# Altium PCB Mach dieu khien dong co dc luu tru.PcbDoc
Units mm, origin at the board's own origin, x right, y up, seen from the top; angles counter-clockwise.
Board outline 133.35 x 92.46 mm, 2 copper layers (Top Layer, Bottom Layer); 58 components, 49 nets, 191 pads, 14 vias.
Unrouted connection lines stored in the file: 6.
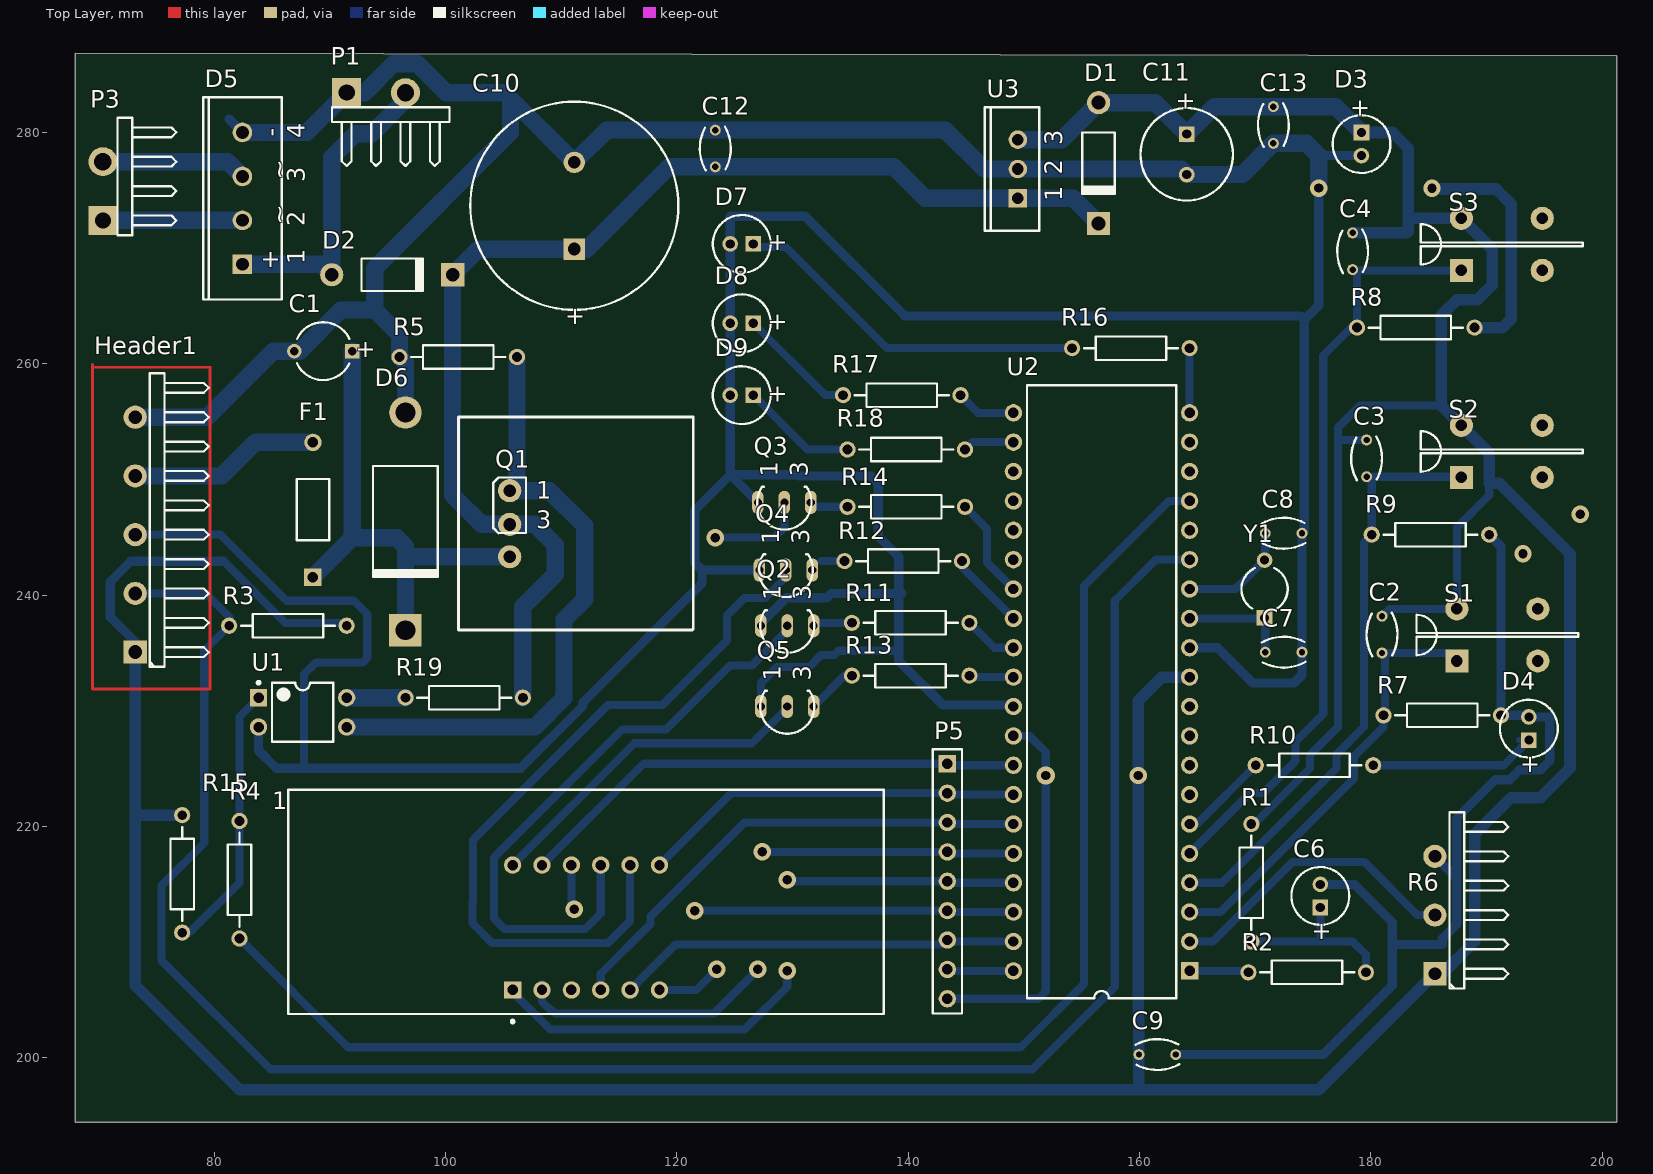
[diagram p0: Top Layer view]
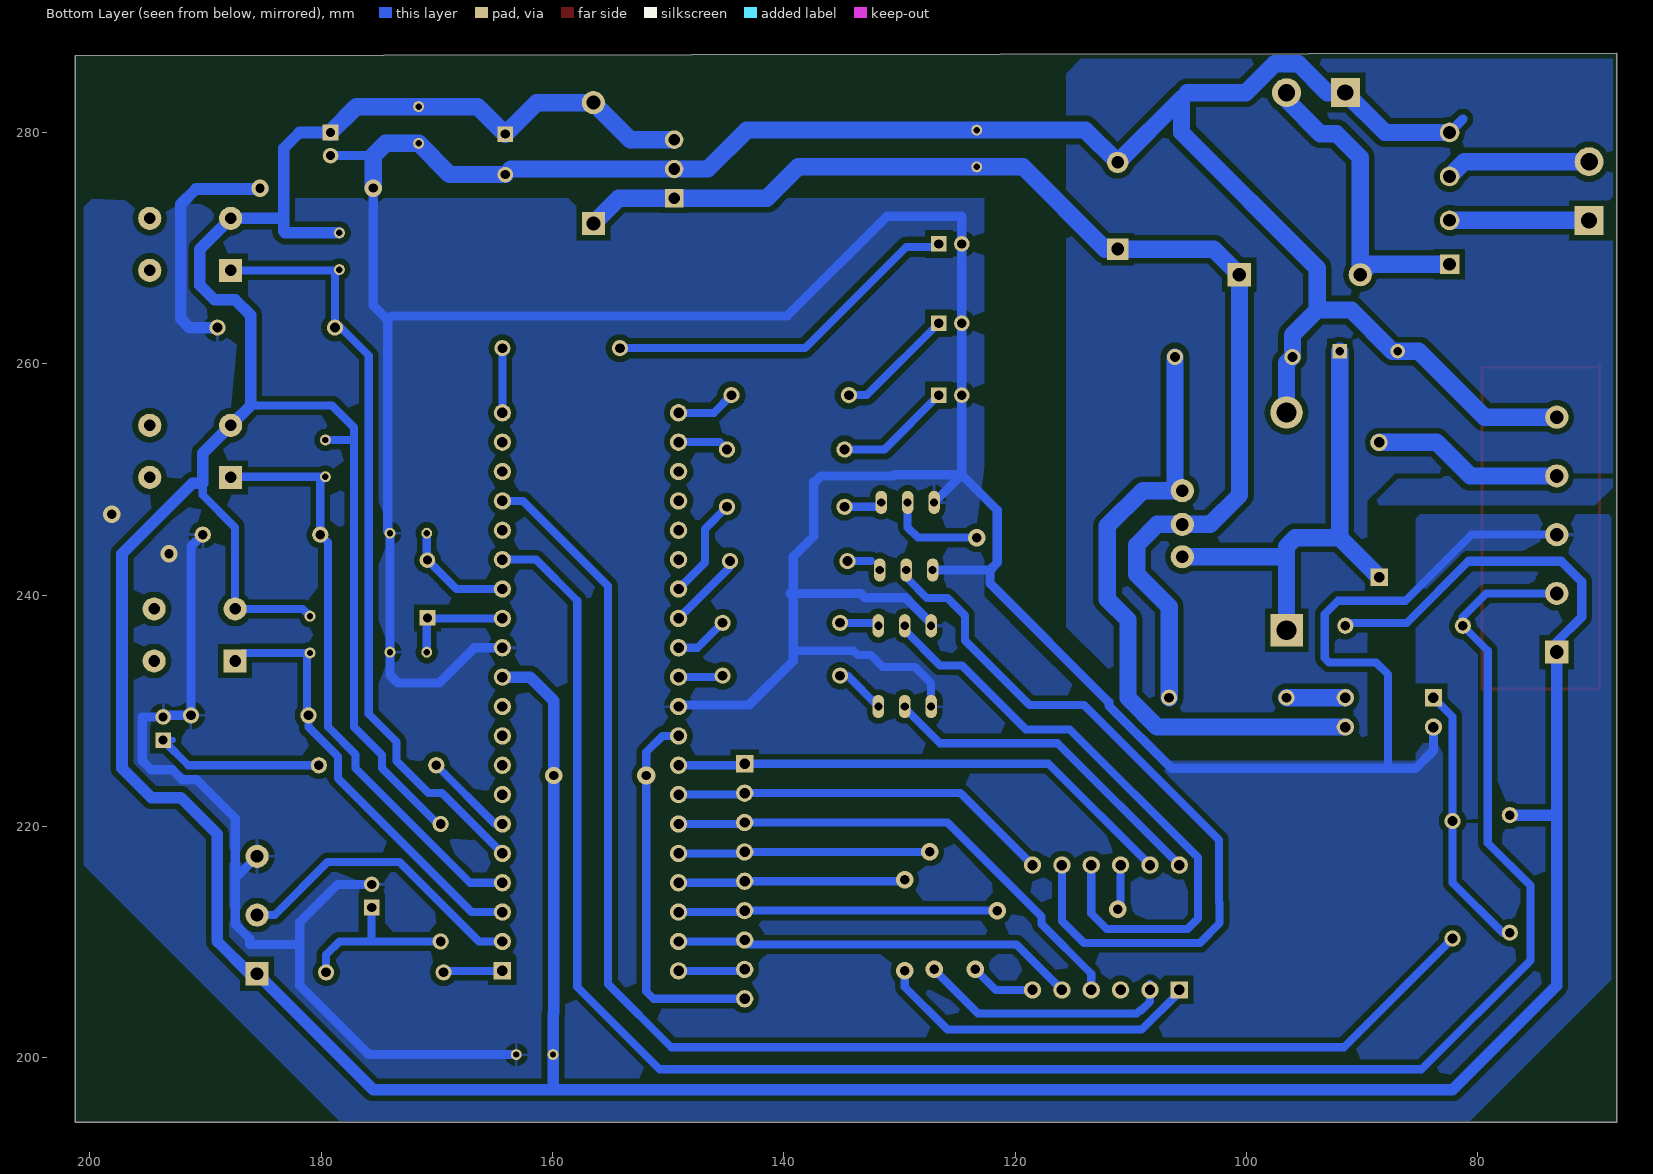
[diagram p1: Bottom Layer view, seen from below]

## Layer stack, top to bottom
Top Layer: signal copper 0.0356
Dielectric: dielectric 0.32, FR-4, Dk 4.8
Bottom Layer: signal copper 0.0356

## Board outline
67.945,286.893 67.945,194.437 201.295,194.437 201.295,286.639

## Design rules (kind name [scope] priority, off if disabled: settings)
Clearance [All] p1: gap=0.5
DiffPairsRouting [All] p1: maxlimit=0.9 minlimit=0.5 mostfreqgap=0.7 maxuncoupledlength=12.7
PolygonConnect [All] p1: connectstyle=Relief reliefconductorwidth=0.254 reliefentries=4 polygonreliefangle="90 Angle"
RoomDefinition "Mach dieu khien dong co dc" [InComponentClass('Mach dieu khien dong co dc')] p1: confinementstyle=ConfineIn formatcopy=TRUE lockcomponents=FALSE outline 211.963,13.208 538.353,13.208 538.353,69.342 211.963,69.342
RoutingLayers [All] p1: top layer_v5=FALSE bottom layer_v5=TRUE
RoutingVias [All] p1: holewidth=0.9 width=2 viastyle="Through Hole" minholewidth=0.8 minwidth=2 maxholewidth=0.1 maxwidth=2
SilkscreenOverComponentPads [All] p1: minsilkscreentomaskgap=0.254
SolderMaskExpansion [All] p1: expansion=0.4
Width [All] p1: maxlimit=1.5 minlimit=1 preferedwidth=1.5 toplayer_maxwidth=1 toplayer_prefwidth=1 bottomlayer_minwidth=1.5 minimp=50.000000 maximp=50.000000 favimp=50.000000
25 further rules are at their usual default settings.

## Components (designator, comment, footprint, x,y, rotation, side; value= is the part's Value field where it differs from the comment)
1 "7seg 4digit" LEDDIP-12/QUAD 112.141,213.487 r0 top
C1 "Cap Pol1" CAPPR5-5x7 89.408,261.112 r180 top
C2 "Cap" CAPNTO3.18-4.83x2.67 180.975,236.601 r90 top
C3 "Cap" CAPNTO3.18-4.83x2.67 179.639,251.841 r90 top
C4 "Cap" CAPNTO3.18-4.83x2.67 178.435,269.748 r90 top
C6 "Cap Pol1" CAPPR2-5x15 175.641,213.995 r90 top
C7 "Cap" CAPNTO3.18-4.83x2.67 172.466,235.077 r180 top
C8 "Cap" CAPNTO3.18-4.83x2.67 172.466,245.364 r180 top
C9 "Cap" CAPNTO3.18-4.83x2.67 161.544,200.279 r180 top
C10 "Cap Pol1" CAPPR7.5-18x40 111.125,273.685 r90 top
C11 "Cap Pol1" CAPPR3.5-8x5 164.084,278.13 r270 top
C12 "Cap" CAPNTO3.18-4.83x2.67 123.317,278.638 r270 top
C13 "Cap" CAPNTO3.18-4.83x2.67 171.577,280.67 r90 top
D1 "Diode Skotchy" DO-41 156.464,277.368 r270 top
D2 "Diode 1N4001" DO-41 95.377,267.716 r0 top
D3 "LED0" CAPPR2-5x15 179.197,279.019 r270 top
D4 "LED0" CAPPR2-5x15 193.675,228.473 r90 top
D5 "Bridge2" SIP-P4/A6.8 82.423,274.32 r90 top
D6 "Diode 1N5408" DO-201AD 96.52,246.38 r270 top
D7 "LED0" CAPPR2-5x15 125.603,270.383 r180 top
D8 "LED0" CAPPR2-5x15 125.603,263.525 r180 top
D9 "LED0" CAPPR2-5x15 125.603,257.302 r180 top
F1 "Fuse Thermal" PIN-W2/E2.8 88.519,247.396 r90 top
Header1 "Header 5 Power" "Header 5 Power" 73.152,235.077 r90 top
P1 "Header 2 power" "conector 2x1 power" 91.44,283.464 r0 top
P3 "Header 2 power" "conector 2x1 power" 70.358,272.415 r90 top
P5 "res bar 330" HDR1X9 143.383,225.425 r270 top
Q1 "MOSFET-N" E3-manh 105.537,247.777 r0 top
Q2 "2SC828" TO-92-manh 129.54,237.363 r90 top
Q3 "2SC828" TO-92-manh 129.286,248.031 r90 top
Q4 "2SC828" TO-92-manh 129.413,242.189 r90 top
Q5 "2SC828" TO-92-manh 129.54,230.378 r90 top
R1 "Res2" AXIAL-0.4 169.672,215.138 r270 top
R2 "Res2" AXIAL-0.4 174.498,207.391 r180 top
R3 "Res2" AXIAL-0.4 86.36,237.363 r180 top
R4 "Res2" AXIAL-0.4 82.169,215.392 r270 top
R5 "Res2" AXIAL-0.4 101.092,260.604 r0 top
R6 "RPot" "Header 3 Power" 185.547,207.264 r90 top
R7 "Res2" AXIAL-0.4 186.182,229.616 r180 top
R8 "Res2" AXIAL-0.4 183.896,263.144 r180 top
R9 "Res2" AXIAL-0.4 185.166,245.237 r180 top
R10 "Res2" AXIAL-0.4 175.133,225.298 r0 top
R11 "Res2" AXIAL-0.4 140.208,237.617 r180 top
R12 "Res2" AXIAL-0.4 139.573,242.951 r180 top
R13 "Res2" AXIAL-0.4 140.208,233.045 r180 top
R14 "Res2" AXIAL-0.4 139.827,247.65 r180 top
R15 "Res2" AXIAL-0.4 77.216,215.9 r90 top
R16 "Res2" AXIAL-0.4 159.258,261.366 r0 top
R17 "Res2" AXIAL-0.4 139.446,257.302 r0 top
R18 "Res2" AXIAL-0.4 139.827,252.603 r0 top
R19 "Res2" AXIAL-0.4 101.6,231.14 r0 top
S1 "SW-PB" "Button DIP4" 187.452,234.315 r90 top
S2 "SW-PB" "Button DIP4" 187.833,250.19 r90 top
S3 "SW-PB" "Button DIP4" 187.833,268.097 r90 top
U1 "Opto" DIP-4 87.63,229.87 r0 top
U2 "PIC16F877A-E/P" PDIP600-40 156.718,231.648 r90 top
U3 "µA7805CKC" SFM-T3/A4.7V 149.479,276.86 r90 top
Y1 "XTAL" CAPR5-4X5 170.815,240.538 r90 top

## Footprints (in the part's own frame and the unit in brackets; to place one, negate y for a bottom-side part, rotate by r counter-clockwise, add the part's x,y. Pads: shape width x height; smd on the part's side, far side on the other; paste and mask are expansions set on the pad)
AXIAL-0.4 [mm] "Axial Device, Thru-Hole; 2 Leads; 0.4 in Pin Spacing"
  round 1.4 hole 0.85: 1(-5.08,0) 2(5.08,0)
  silkscreen extent -4.06,-1.02 4.06,1.02
"Button DIP4" [mm]
  rect 2x2 hole 1: 1(0,0)
  round 2 hole 1: 2(4.5,0) 3(4.5,-7) 4(0,-7)
  silkscreen extent 0.5,-10.5 4,3.5
CAPNTO3.18-4.83x2.67 [mm] "Capacitor, Radial, Tantalum, Non-Polarised; Body 4.83 x 2.67 x 5.97 mm (WxTxH max); Pin Spacing 3.18 mm (typ)"
  round 0.95 hole 0.55: 1(-1.59,0) 2(1.59,0)
  silkscreen extent -1.89,-1.34 1.89,1.34
CAPPR2-5x15 [mm] "Capacitor, Electrolytic, Radial; Body 5 x 15 mm (Dia.xH typ); Pin Spacing 2 mm (typ)"
  rect 1.35x1.35 hole 0.8: 1(-1,0)
  round 1.35 hole 0.8: 2(1,0)
  silkscreen extent -2.5,-2.5 2.5,2.5
CAPPR3.5-8x5 [mm] "Capacitor, Electrolytic, Radial; Body 8 x 5 mm (Dia.xH typ); Pin Spacing 3.5 mm (typ)"
  rect 1.35x1.35 hole 0.8: 1(-1.75,0)
  round 1.35 hole 0.8: 2(1.75,0)
  silkscreen extent -4,-4 4,4
CAPPR5-5x7 [mm] "Capacitor, Electrolytic, Radial; Body 5 x 7 mm (Dia.xH typ); Pin Spacing 5 mm (typ)"
  rect 1.25x1.25 hole 0.75: 1(-2.5,0)
  round 1.25 hole 0.75: 2(2.5,0)
  silkscreen extent -2.26,-2.5 2.27,2.5
CAPPR7.5-18x40 [mm] "Capacitor, Electrolytic, Radial; Body 18 x 40 mm (Dia.xH typ); Pin Spacing 7.5 mm (typ)"
  rect 1.85x1.85 hole 1.1: 1(-3.75,0)
  round 1.85 hole 1.1: 2(3.75,0)
  silkscreen extent -9,-9 9,9
CAPR5-4X5 [mm] "Capacitor; 2 Leads"
  rect 1.35x1.35 hole 0.8: 1(-2.5,0)
  round 1.35 hole 0.8: 2(2.5,0)
  silkscreen extent -1.69,-2 1.82,2
"conector 2x1 power" [mm] "Connector; Header; 4 Position; Right Angle"
  rect 2.5x2.5 hole 1.4: 1(0,0)
  round 2.5 hole 1.5: 2(5.08,0)
  silkscreen extent -1.27,-6.35 8.89,-1.27
DIP-4 [mm] "DIP; 4 Leads; Row Spacing 7.62 mm; Pitch 2.54 mm"
  rect 1.5x1.5 hole 0.9: 1(-3.81,1.27)
  round 1.5 hole 0.9: 2(-3.81,-1.27) 3(3.81,-1.27) 4(3.81,1.27)
  silkscreen extent -3.93,-2.55 2.65,2.69, body extent -3.15,-2.5 3.15,2.5, height 5.6
DO-41 [mm] "Diode, Axial; Body 5.2 x 2.7 mm (LxDia. max), Lead Dia. 0.86 mm (max)"
  round 2 hole 1.2: 1(-5.23,0)
  rect 2x2 hole 1.2: 2(5.23,0)
  silkscreen extent -2.65,-1.4 2.74,1.4
DO-201AD [mm] "Diode, Axial; Body 9.5 x 5.6 mm (LxDia. max), Lead Dia. 1.32 mm (max)"
  round 2.8 hole 1.7: 1(-9.42,0)
  rect 2.8x2.8 hole 1.7: 2(9.42,0)
  silkscreen extent -4.8,-2.8 4.9,2.8
E3-manh [mm] "TO, Flat Index; 3 In-Line, Axial Leads; Body Dia. 4.6mm; Lead Dia. 0.5 mm (max)"
  round 2 hole 1.1: 1(0,1.27) 2(0,-1.651) 3(0,-4.445)
  silkscreen extent -4.44,-10.79 15.88,7.62
HDR1X9 [mm] "Connector; Header; 9 Position"
  rect 1.5x1.5 hole 0.9: 1(0,0)
  round 1.5 hole 0.9: 2(2.54,0) 3(5.08,0) 4(7.62,0) 5(10.16,0) 6(12.7,0) 7(15.24,0) 8(17.78,0) 9(20.32,0)
  silkscreen extent -1.27,-1.27 21.59,1.27
"Header 3 Power" [mm]
  rect 2x2 hole 1.1: 1(0,0)
  round 2 hole 1.1: 2(5.08,0) 3(10.16,0)
  silkscreen extent -1.27,-6.35 13.97,-1.27
"Header 5 Power" [mm] "Connector; Header; 10 Position; Right Angle"
  rect 2x2 hole 1.2: 1(0,0)
  round 2 hole 1.2: 2(5.08,0) 3(10.16,0) 4(15.24,0) 5(20.32,0)
  Top Layer lines w0.254: 24.892,3.683 -3.175,3.683 -3.175,-6.477 24.638,-6.477 24.638,3.429
  silkscreen extent -1.27,-6.35 24.13,-1.27
LEDDIP-12/QUAD [mm] "LED, 7-Segment Display, 14.22 mm, Four Digit, 88:88; 12 Leads; Row Space 15.24 mm; Pitch 2.54 mm"
  rect 1.5x1.5 hole 0.9: 1(-6.35,-7.62)
  round 1.5 hole 0.9: 2(-3.81,-7.62) 3(-1.27,-7.62) 4(1.27,-7.62) 5(3.81,-7.62) 6(6.35,-7.62) 7(6.35,3.175) 8(3.81,3.175) 9(1.27,3.175) 10(-1.27,3.175) 11(-3.81,3.175) 12(-6.35,3.175)
  silkscreen extent -25.75,-10.47 25.75,9.7
PDIP600-40 [mm] "DIP, Plastic; 40 Leads; Row Spacing 15.24 mm; Pitch 2.54 mm"
  rect 1.5x1.5 hole 0.9: 1(-24.13,-7.62)
  round 1.5 hole 0.9: 2(-21.59,-7.62) 3(-19.05,-7.62) 4(-16.51,-7.62) 5(-13.97,-7.62) 6(-11.43,-7.62) 7(-8.89,-7.62) 8(-6.35,-7.62) 9(-3.81,-7.62) 10(-1.27,-7.62) 11(1.27,-7.62) 12(3.81,-7.62) 13(6.35,-7.62) 14(8.89,-7.62) 15(11.43,-7.62) 16(13.97,-7.62) 17(16.51,-7.62) 18(19.05,-7.62) 19(21.59,-7.62) 20(24.13,-7.62) 21(24.13,7.62) 22(21.59,7.62) 23(19.05,7.62) 24(16.51,7.62) 25(13.97,7.62) 26(11.43,7.62) 27(8.89,7.62) 28(6.35,7.62) 29(3.81,7.62) 30(1.27,7.62) 31(-1.27,7.62) 32(-3.81,7.62) 33(-6.35,7.62) 34(-8.89,7.62) 35(-11.43,7.62) 36(-13.97,7.62) 37(-16.51,7.62) 38(-19.05,7.62) 39(-21.59,7.62) 40(-24.13,7.62)
  silkscreen extent -26.5,-6.45 26.5,6.45
PIN-W2/E2.8 [mm] "Thru-Hole; 2 Leads"
  rect 1.5x1.5 hole 0.9: 1(-5.825,0)
  round 1.5 hole 0.9: 2(5.825,0)
  silkscreen extent -2.65,-1.4 2.65,1.4
SFM-T3/A4.7V [mm]
  rect 1.6x1.6 hole 1: 1(-2.54,0)
  round 1.6 hole 1: 2(0,0) 3(2.54,0)
  silkscreen extent -5.35,-1.85 5.35,2.85
SIP-P4/A6.8 [mm] "SIP; 4 Leads; Body 15 x 17.5 x 6.8 mm (typ); Pitch 3.8 mm"
  rect 1.7x1.7 hole 1.1: 1(-5.7,0)
  round 1.7 hole 1.1: 2(-1.9,0) 3(1.9,0) 4(5.7,0)
  silkscreen extent -8.75,-3.4 8.75,3.4
TO-92-manh [mm] "TO, Flat Index; 3 In-Line, Axial Leads; Body Dia. 4.6mm; Leads 0.41 x 0.39 mm (max)"
  oval 2x1 hole 0.7: 1(0,2.286) 2(0,0) 3(0,-2.286)
  silkscreen extent -2.34,-2.34 1.35,2.34

## Part data
1: "Header, 6-Pin, Dual row"
C1 C6 C10 C11: "Polarized Capacitor (Radial)"
C2 C3 C4 C7 C8 C9 C12 C13: "Capacitor"
D1: library part "Diode 1N4001", "1 Amp General Purpose Rectifier"
D2: "1 Amp General Purpose Rectifier"
D3 D4 D7 D8 D9: "Typical INFRARED GaAs LED"
D5: "Diode Bridge"
D6: "3 Amp Medium Power Silicon Rectifier Diode"
F1: "Thermal Fuse"
P1: "Header, 4-Pin, Right Angle"
P3: "Header, 2-Pin, Right Angle"
P5: library part "Header 9", "Header, 9-Pin"
Q1: "N-Channel MOSFET"
Q2 Q3 Q4 Q5: "NPN General Purpose Amplifier"
R1 R2 R3 R4 R5 R7 R8 R9 R10 R11 R12 R13 R14 R15 R16 R17 R18 R19: "Resistor"
R6: "Potentiometer"
S1 S2 S3: "Switch"
U1: library part "Opto 1"
U2: "Enhanced FLASH Microcontroller, 8K (x14-Bit words) FLASH, 368 Bytes RAM, 40-Pin PDIP, Standard VDD Range, Extended Temperature"
U3: "Positive-Voltage Regulator"
Y1: "Crystal Oscillator"

## Via types
v1: diameter 1.5, hole 0.811, Top Layer to Bottom Layer, 8 vias
v2: diameter 1.5, hole 0.8, Top Layer to Bottom Layer, 3 vias
v3: diameter 1.5, hole 0.81, Top Layer to Bottom Layer, 2 vias
v4: diameter 1.57, hole 0.811, Top Layer to Bottom Layer, 1 vias

## Nets (pads, with @x,y where several pads share a name; then routed paths per layer and width w, separated by ;. In a path a pad name is that pad's centre, name@x,y a point inside that pad or via, vN(x,y) a via of type N, cw(c..) or ccw(c..) an arc to the next point about the centre after c; other vN are vias at no path point)
COUNTER: Header1.2 R3.2 U2.15 | length 171.7
  Bottom Layer w0.7: Header1.2 79.248,240.157 81.28,238.125 R3.2 79.121,235.204 79.121,218.567 75.438,214.884 75.438,208.407 84.836,199.009 150.749,199.009 157.861,206.121 157.861,239.522 161.417,243.078 U2.15
GND: C1.2 C6.2 C7.1 C8.1 C9.1 C10.2 C11.2 C12.1 C13.1 D3.2 D4.2 D5.4 D6.1 D7.2 D8.2 D9.2 Header1.3 Header1.5 P1.1 Q2.1 Q3.1 Q4.1 Q5.1 R5.1 R6.3 R7.1 R8.1 R9.1 U1.2 U2.12 U2.31 U3.2 | length 582.4
  Bottom Layer w0.7: Header1.3 80.518,245.237 86.233,239.522 92.075,239.522 93.218,238.379 93.218,234.569 92.837,234.188 88.773,234.188 87.757,233.172 87.757,225.044 ; Q5.1 127.254,232.41 128.651,233.807 131.445,233.807 132.461,234.823 133.604,234.823 133.985,235.204 139.065,235.204
  Bottom Layer w0.8: 81.265,281.178 D5.4 ; U1.2 83.82,226.568 85.344,225.044 87.757,225.044 106.473,225.044 111.886,230.457 111.886,230.758 122.174,241.046 122.174,242.189 ; Q3.1 124.603,250.428 ; Q4.1 122.174,242.189 ; Q2.1 127.254,237.557 129.473,239.776 132.969,239.776 133.35,240.157 139.192,240.157 ; U2.31@148.971,230.505 143.002,230.505 139.192,234.315 139.192,240.157 ; C9.1 175.895,200.279 181.864,206.248 181.864,209.804 ; U2.12 166.751,235.458 169.799,232.41 173.355,232.41 174.056,233.111 C7.1 C8.1 ; C8.1@174.244,245.552 174.244,263.811 ; v2(175.498,275.209) 175.498,265.065 174.244,263.811 ; 175.498,278.019 D3.2 ; C6.2 178.578,214.995 181.864,211.709 181.864,209.804 ; R6.3 187.447,215.524 ; R9.1 191.262,244.221 R7.1 D4.2@193.532,229.616 ; D4.2 195.469,229.473 195.469,225.695 194.691,224.917 192.887,224.917 192.018,224.048 190.774,224.048 187.447,220.721 187.447,215.524 ; 122.174,242.189 121.539,242.824 121.539,247.364 124.603,250.428 ; 124.603,250.428 130.445,250.428 130.556,250.317 136.779,250.317 137.287,249.809 137.414,249.809 137.414,245.11 139.192,243.332 139.192,240.411 ; 124.603,250.428 D9.2 D8.2 D7.2 124.603,272.78 131.08,272.78 139.7,264.16 173.895,264.16 174.244,263.811 ; 139.192,240.157 139.192,240.411 ; 139.192,240.157 139.446,240.157 139.192,240.411 ; 181.864,209.804 186.182,209.804 186.182,210.292 187.447,211.557 187.447,215.524
  Bottom Layer w1: v3@185.039,275.13 190.833,275.13 192.151,273.812 192.151,263.906 191.389,263.144 R8.1
  Bottom Layer w1.5: Header1.5 79.375,255.397 85.09,261.112 C1.2 87.376,261.112 90.932,264.668 93.853,264.668 ; D5.4 87.996,280.02 P1.1 92.984,283.464 95.484,285.964 97.556,285.964 100.056,283.464 105.096,283.464 ; D6.1 96.52,260.096 R5.1 96.012,262.509 93.853,264.668 ; 163.604,276.86 U3.2 146.558,276.86 143.19,280.228 C12.1 113.918,280.228 C10.2 105.604,282.956 105.604,280.015 93.853,268.264 93.853,264.668 ; C11.2 168.877,276.38 C13.1 174.437,279.08 175.498,278.019 v2(175.498,275.209)
  other v1: 193.167,243.586 198.12,247.015
  other v3: 185.293,275.209
Net1_1: 1.1 P5.5 U2.37 | length 47.7
  Bottom Layer w0.7: 1.1 105.791,205.694 109.047,202.438 125.857,202.438 129.54,206.121 v2(129.54,207.518) ; v1(129.54,215.392) 129.667,215.265 P5.5 ; P5.5@143.51,215.138 U2.37
Net1_2: 1.2 P5.4 U2.36 | length 43.9
  Bottom Layer w0.7: 1.2@108.331,206.375 1.2 108.331,204.851 109.093,204.089 109.22,204.089 109.474,203.835 123.19,203.835 v1(127,207.645) v1@127,207.772 ; v1(127.381,217.805) P5.4 ; P5.4@143.51,217.678 U2.36
Net1_4: 1.4 P5.3 U2.35 | length 42.7
  Bottom Layer w0.7: 1.4 113.411,207.264 117.729,211.582 117.729,212.217 125.857,220.345 P5.3 ; P5.3@143.51,220.218 U2.35
Net1_5: 1.5 P5.7 U2.39 | length 34.3
  Bottom Layer w0.7: 1.5 119.888,209.804 P5.7@143.002,209.804 ; P5.7@143.51,210.058 U2.39
Net1_6: 1.6 Q3.2 | length 14.2
  Bottom Layer w0.7: 1.6 121.666,205.867 v1(123.444,207.645) ; v3(123.317,244.983) 128.397,244.983 129.286,245.872 Q3.2
Net1_7: 1.7 P5.2 U2.34 | length 33.1
  Bottom Layer w0.7: 1.7 124.714,222.885 P5.2 ; P5.2@143.51,222.758 U2.34
Net1_8: 1.8 Q4.2 | length 64.9
  Bottom Layer w0.7: 1.8 115.951,211.836 114.046,209.931 104.013,209.931 102.305,211.639 102.305,213.406 102.362,213.463 102.362,218.821 114.046,230.505 118.745,230.505 124.333,236.093 124.333,238.252 125.857,239.776 127.635,239.776 Q4.2@129.413,241.554
Net1_9: 1.9 Q2.2 | length 53.1
  Bottom Layer w0.7: 1.9 113.411,212.471 112.071,211.131 105.099,211.131 104.191,212.039 104.191,217.325 115.269,228.403 119.056,228.403 124.587,233.934 126.492,233.934 Q2.2@129.54,236.982
Net1_10: 1.10 P5.6 U2.38 | length 31.7
  Bottom Layer w0.7: v2(111.125,212.852) 110.871,213.106 1.10 1.10@111.125,216.408 ; v1(121.539,212.725) P5.6 ; P5.6@143.51,212.598 U2.38
Net1_11: 1.11 P5.1 U2.33 | length 44.3
  Bottom Layer w0.7: 1.11 117.094,225.425 P5.1 ; P5.1@143.51,225.298 U2.33
Net1_12: 1.12 Q5.2 | length 29.5
  Bottom Layer w0.7: 1.12 116.332,227.203 126.488,227.203 129.54,230.255 Q5.2
NetC1_1: C1.1 D6.2 F1.1 Q1.3 | length 42
  Bottom Layer w1.5: F1.1 91.908,244.96 ; C1.1 91.908,244.96 ; D6.2 96.52,244.221 95.781,244.96 91.908,244.96 ; 96.647,243.332 Q1.3
NetC2_1: C2.1 R7.2 S1.1 U2.3 | length 37.7
  Bottom Layer w0.7: U2.3 167.005,212.598 178.562,224.155 178.562,226.06 181.102,228.6 R7.2 ; R7.2@181.229,229.743 181.229,234.757 C2.1 186.756,235.011 S1.1
NetC3_1: C3.1 R9.2 S2.1 U2.4 | length 51.7
  Bottom Layer w0.7: U2.4 167.132,215.138 177.038,225.044 177.038,226.233 179.428,228.623 179.428,244.579 R9.2 180.086,249.804 C3.1 187.772,250.251 S2.1
NetC4_1: C4.1 R8.2 S3.1 U2.5 | length 66.9
  Bottom Layer w0.7: U2.5 169.568,222.908 170.711,222.908 173.482,225.679 173.482,227.33 175.895,229.743 175.895,260.731 178.308,263.144 R8.2 178.816,267.777 178.496,268.097 S3.1
NetC6_1: C6.1 R1.2 R2.1 | length 14.7
  Bottom Layer w0.7: R1.2 178.435,210.058 179.578,208.915 R2.1 ; 175.641,210.185 C6.1
NetC7_2: C7.2 U2.13 Y1.1 | length 9.3
  Bottom Layer w0.7: U2.13 Y1.1@170.775,237.998 ; C7.2 Y1.1@170.876,237.977
NetC8_2: C8.2 U2.14 Y1.2 | length 9.8
  Bottom Layer w0.7: U2.14 168.315,240.538 Y1.2 ; Y1.2@170.876,243.099 C8.2
NetD2_1: D2.1 D5.1 P1.2 | length 26.7
  Bottom Layer w1.5: D5.1 89.243,268.62 D2.1 90.147,277.853 92.202,279.908 93.599,279.908 P1.2@96.52,282.829
NetD4_1: D4.1 R10.2 | length 15.2
  Bottom Layer w0.5: 192.802,227.473 D4.1
  Bottom Layer w0.7: R10.2 191.5,225.298 D4.1
NetD5_2: D5.2 P3.1 | length 12.1
  Bottom Layer w1.5: P3.1 D5.2@82.418,272.415
NetD5_3: D5.3 P3.2 | length 12.6
  Bottom Layer w1.5: P3.2 81.148,277.495 D5.3
NetD7_1: D7.1 R16.1 | length 31
  Bottom Layer w0.7: D7.1@126.857,270.129 129.413,270.129 138.176,261.366 R16.1
NetD8_1: D8.1 R17.1 | length 10.3
  Bottom Layer w0.7: D8.1 132.826,257.302 R17.1
NetD9_1: D9.1 R18.1 | length 10.1
  Bottom Layer w0.7: D9.1 131.302,252.603 R18.1
NetF1_2: F1.2 Header1.4 | length 16.6
  Bottom Layer w1.5: Header1.4 80.645,250.317 83.549,253.221 F1.2
NetP5_8: P5.8 U2.40 | length 5.6
  Bottom Layer w0.7: P5.8@143.51,207.518 U2.40
NetQ1_1: Q1.1 R5.2 U1.3 | length 54.1
  Bottom Layer w1.5: U1.3 107.696,228.6 110.236,231.14 110.236,237.871 112.014,239.649 112.014,245.999 108.966,249.047 Q1.1 ; Q1.1@106.172,249.682 R5.2
NetQ2_3: Q2.3 R11.2 | length 3
  Bottom Layer w0.7: Q2.3@132.08,237.617 R11.2
NetQ3_3: Q3.3 R14.2 | length 2.8
  Bottom Layer w0.7: Q3.3@131.953,247.65 R14.2
NetQ4_3: Q4.3 R12.2 | length 2
  Bottom Layer w0.7: 132.461,242.951 R12.2
NetQ5_3: Q5.3 R13.2 | length 4.4
  Bottom Layer w0.7: Q5.3 134.493,233.045 R13.2
NetR2_2: R2.2 U2.1 | length 5
  Bottom Layer w0.7: U2.1 R2.2@169.291,207.518
NetR4_2: R4.2 U2.17 | length 125.8
  Bottom Layer w0.7: R4.2 91.567,200.914 149.733,200.914 155.194,206.375 155.194,240.792 162.56,248.158 U2.17
NetR6_2: R6.2 U2.2 | length 25.9
  Bottom Layer w0.7: U2.2 166.37,210.058 173.228,216.916 179.451,216.916 184.023,212.344 R6.2
NetR10_1: R10.1 U2.6 | length 7.2
  Bottom Layer w0.7: U2.6@164.973,220.218 R10.1
NetR16_2: R16.2 U2.20 | length 5.6
  Bottom Layer w0.7: U2.20 R16.2
NetR17_2: R17.2 U2.21 | length 5.2
  Bottom Layer w0.7: R17.2 146.05,255.778 U2.21
NetR18_2: R18.2 U2.22 | length 4.5
  Bottom Layer w0.7: R18.2 145.542,253.238 U2.22
NetR19_1: R19.1 U1.4 | length 5.1
  Bottom Layer w1.5: U1.4 R19.1
PWM: R4.1 R15.1 U1.1 | length 23.4
  Bottom Layer w0.7: R15.1 77.851,210.82 82.169,215.138 R4.1 82.169,229.489 U1.1
RD4: R14.1 U2.27 | length 8.8
  Bottom Layer w0.7: R14.1 146.812,245.745 146.812,242.824 U2.27
RD5: R12.1 U2.28 | length 6.3
  Bottom Layer w0.7: R12.1@144.653,242.443 U2.28
RD6: R11.1 U2.29 | length 4.7
  Bottom Layer w0.7: R11.1 147.447,235.458 U2.29
RD7: R13.1 U2.30 | length 3.9
  Bottom Layer w0.7: R13.1 145.415,232.918 U2.30
VCC: C2.2 C3.2 C4.2 C9.2 C11.1 C13.2 D1.1 D3.1 Header1.1 P5.9 R1.1 R3.1 R6.1 R15.2 S1.2 S2.2 S3.2 U2.11 U2.32 U3.3 | length 459.4
  Bottom Layer w0.7: 80.772,242.951 86.106,237.617 R3.1@91.186,237.617 ; P5.9 151.257,205.105 151.892,205.74 151.892,226.441 150.495,227.838 U2.32 ; R1.1 169.926,220.218 174.752,225.044 174.752,226.187 177.165,228.6 177.165,254.508 179.07,256.413 186.11,256.413 ; 177.231,253.431 C3.2 ; C2.2 181.599,238.815 S1.2 187.452,245.872 190.246,248.666 190.246,249.682
  Bottom Layer w0.8: Header1.1 73.152,235.966 70.993,238.125 70.993,241.173 72.771,242.951 80.772,242.951
  Bottom Layer w1: Header1.1 73.152,220.98 ; R15.2 73.152,220.98 ; 159.893,203.835 159.893,230.886 161.925,232.918 U2.11 ; 159.954,197.419 C9.2 159.954,203.774 ; C4.2 183.134,271.338 ; D3.1 181.88,280.019 183.261,278.638 183.261,271.465 ; 183.46,272.597 S3.2 190.5,269.93 190.5,266.827 189.23,265.557 187.452,265.557 186.11,264.215 186.11,256.413 S2.2 190.246,252.277 190.246,249.682 191.135,249.682 197.231,243.586 197.231,225.044 194.691,222.504 192.151,222.504 188.976,219.329 188.976,210.058 186.182,207.264 R6.1 175.514,197.231 82.169,197.231 73.152,206.248 73.152,220.98
  Bottom Layer w1.5: U3.3 153.266,279.4 D1.1 161.366,282.598 C11.1 166.464,282.26 C13.2 176.956,282.26 D3.1
  other v1: 159.893,224.409
  other v4: 151.892,224.409
"VCC 2": C10.1 C12.2 D1.2 D2.2 Q1.2 R19.2 U3.1 | length 105.8
  Bottom Layer w1.5: D2.2@100.584,267.693 100.584,248.666 103.124,246.126 Q1.2 107.696,246.126 109.474,244.348 109.474,241.808 106.68,239.014 R19.2 ; D2.2 102.826,269.935 C10.1 112.201,269.935 119.314,277.048 C12.2 138.75,277.048 141.478,274.32 U3.1 154.282,274.32 D1.2
pads on no net: 1.3 S1.3 S1.4 S2.3 S2.4 S3.3 S3.4 U2.7 U2.8 U2.9 U2.10 U2.16 U2.18 U2.19 U2.23 U2.24 U2.25 U2.26

## Polygon pours and split planes (outlines as drawn)
no net on Bottom Layer "Bottom-GND" (solid, pour order 18): 68.453,252.222 89.408,252.222 90.17,251.46 90.17,247.777 69.85,247.777 68.326,249.301 68.326,250.571
no net on Bottom Layer "Bottom-GND" (solid, pour order 16): 68.326,286.385 114.3,286.385 115.57,285.115 115.57,237.236 106.045,227.711 89.535,227.711 89.535,248.158 88.265,249.428 87.122,250.571 68.326,250.571
GND on Bottom Layer "Bottom-GND" (solid, pour order 14): 122.682,274.32 200.279,274.32 200.533,274.066 200.533,222.504 200.533,216.662 178.562,194.691 178.435,194.564 82.296,194.564 80.645,194.564 68.707,206.502 68.453,206.756 68.453,246.761 68.707,247.015 84.963,247.015 85.344,246.634 85.344,225.679 108.458,225.679 118.237,235.458 122.682,239.903

## Text inside footprints (layer, text, board x,y; h text height)
C1: Top Overlay "+" at 93.958,261.862 h1.5 r180
C6: Top Overlay "+" at 176.391,210.02 h1.5 r90
C10: Top Overlay "+" at 111.875,263.21 h1.5 r90
C11: Top Overlay "+" at 163.334,283.605 h1.5 r270
D3: Top Overlay "+" at 178.447,282.994 h1.5 r270
D4: Top Overlay "+" at 194.425,224.498 h1.5 r90
D5: Top Overlay "-" at 85.613,279.64 h1.5 r90; Top Overlay "+" at 85.503,268.14 h1.5 r90; Top Overlay "~" at 86.363,275.92 h1.5 r90; Top Overlay "~" at 86.363,272.05 h1.5 r90; Top Overlay "1" at 87.803,268.62 h1.5 r90; Top Overlay "2" at 87.803,271.912 h1.5 r90; Top Overlay "3" at 87.803,275.712 h1.5 r90; Top Overlay "4" at 87.803,279.512 h1.5 r90
D7: Top Overlay "+" at 129.578,271.133 h1.5 r180
D8: Top Overlay "+" at 129.578,264.275 h1.5 r180
D9: Top Overlay "+" at 129.578,258.052 h1.5 r180
Q1: Top Overlay "1" at 107.812,248.332 h1.5; Top Overlay "3" at 107.812,245.814 h1.5
Q2: Top Overlay "1" at 128.98,239.587 h1.5 r90; Top Overlay "3" at 131.575,239.587 h1.5 r90
Q3: Top Overlay "1" at 128.726,250.255 h1.5 r90; Top Overlay "3" at 131.321,250.255 h1.5 r90
Q4: Top Overlay "1" at 128.853,244.413 h1.5 r90; Top Overlay "3" at 131.448,244.413 h1.5 r90
Q5: Top Overlay "1" at 128.98,232.602 h1.5 r90; Top Overlay "3" at 131.575,232.602 h1.5 r90
U3: Top Overlay "2" at 153.304,276.36 h1.5 r90; Top Overlay "1" at 153.304,274.07 h1.5 r90; Top Overlay "3" at 153.304,278.9 h1.5 r90